# Altium PCB MachSacXa.PcbDoc
Units mil, origin at the board's own origin, x right, y up, seen from the top; angles counter-clockwise.
Board outline 8510 x 2835 mil, 2 copper layers (Top Layer, Bottom Layer); 123 components, 50 nets, 379 pads, 95 vias.
Unrouted connection lines stored in the file: 3.
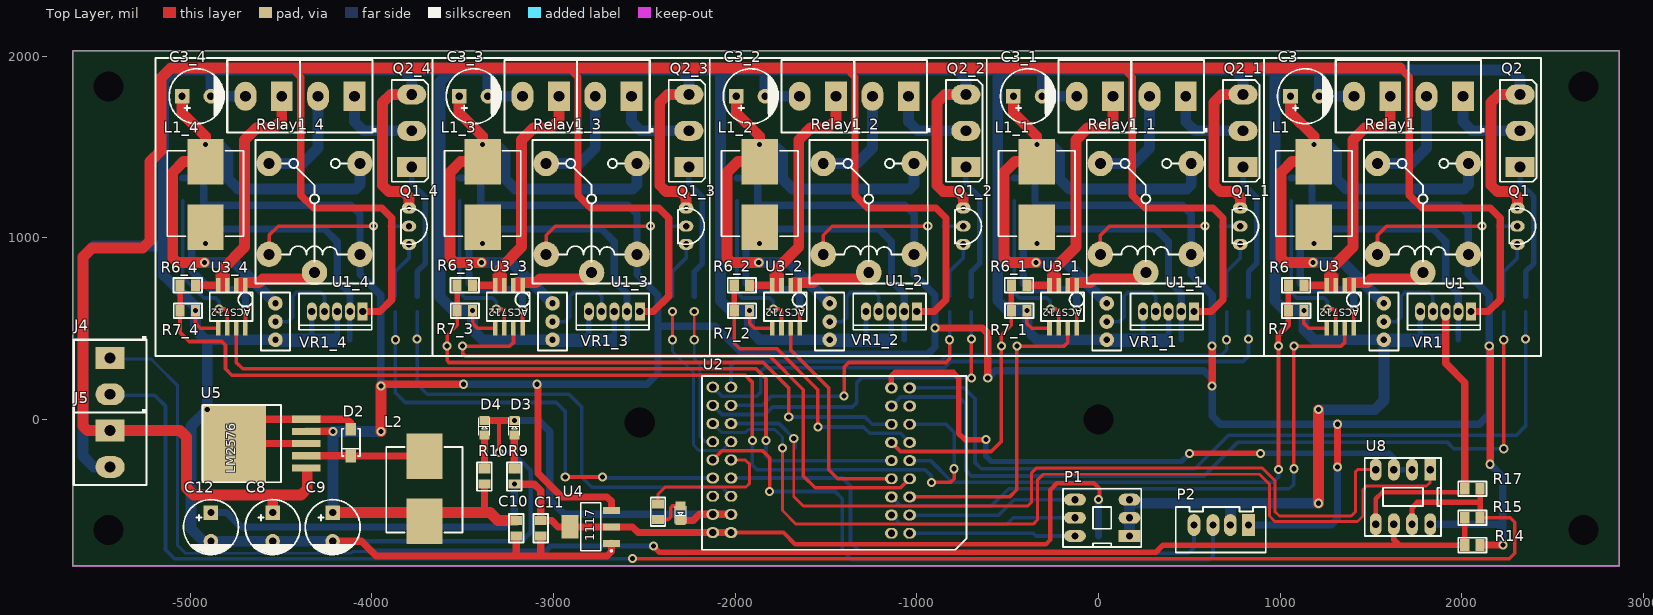
[diagram p0: Top Layer view]
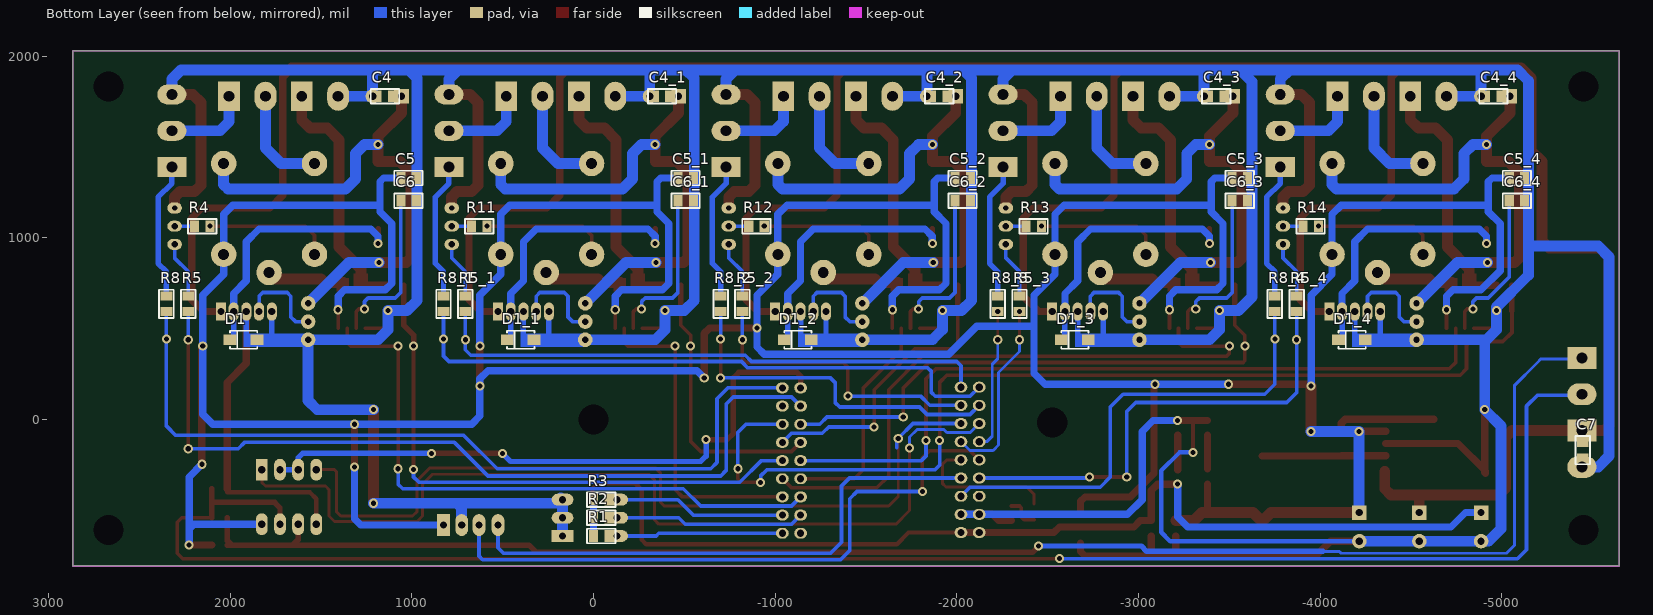
[diagram p1: Bottom Layer view, seen from below]
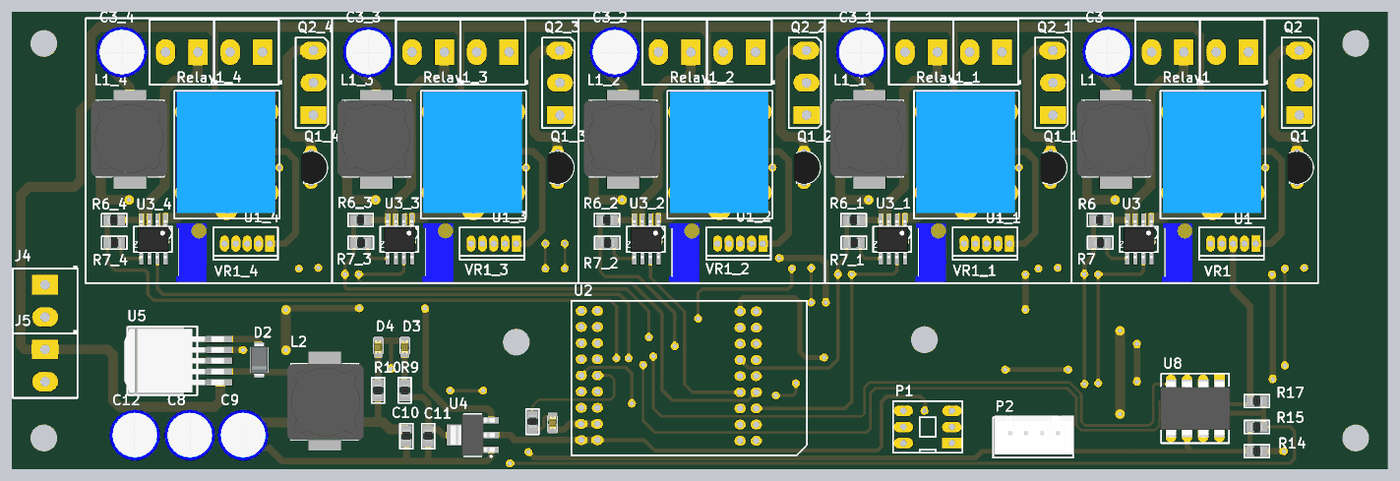
[diagram p2: 3D render of the assembled board from above, using the file's embedded part models]
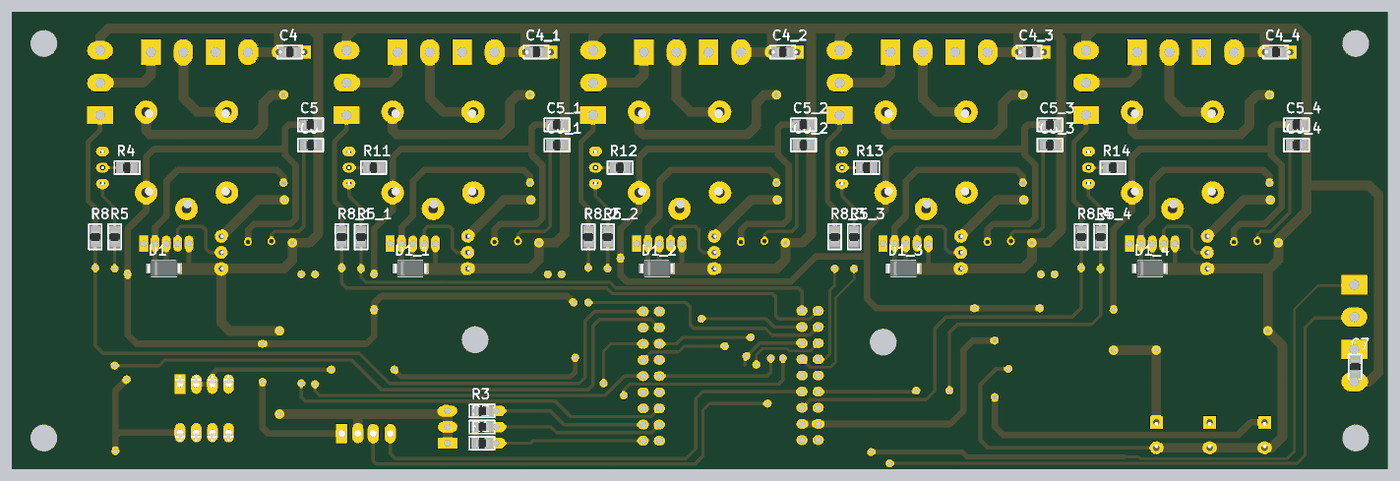
[diagram p3: 3D render of the assembled board from below, using the file's embedded part models]

## Layer stack, top to bottom
Top Layer: signal copper 1.4
Dielectric: dielectric 12.6, FR-4, Dk 4.8
Bottom Layer: signal copper 1.4

## Board outline
-5645,2030 2865,2030 2865,-805 -5645,-805

## Design rules (kind name [scope] priority, off if disabled: settings)
Clearance [All] p1: gap=10
PolygonConnect [All] p1: connectstyle=Relief reliefconductorwidth=10 reliefentries=4 polygonreliefangle="90 Angle" airgapwidth=10
RoutingVias [All] p1: holewidth=28 width=50 viastyle="Through Hole" minholewidth=28 minwidth=50 maxholewidth=28 maxwidth=50
SilkscreenOverComponentPads [All] p1: minsilkscreentomaskgap=10
SolderMaskExpansion [All] p1: expansion=4
Width [All] p1: maxlimit=120 minlimit=14 preferedwidth=20
27 further rules are at their usual default settings.

## Classes and differential pairs
component class MachSacXa: C3 C4 C5 C6 C7 C8 C9 C10 C11 C12 D1 D2 D3 D4 J4 J5 L1 L2 P1 P2 Q1 Q2 R1 R2 R3 R4 R5 R6 R7 R8 R9 R10 Relay1 U1 U2 U3 U4 U5 VR1 ""

## Components (designator, comment, footprint, x,y, rotation, side; value= is the part's Value field where it differs from the comment)
C3 "" C_D300 1135,1780 r0 top
C3_1 "" C_D300 -390,1780 r0 top (schematic designator C3)
C3_2 "" C_D300 -1915,1780 r0 top (schematic designator C3)
C3_3 "" C_D300 -3440,1780 r0 top (schematic designator C3)
C3_4 "" C_D300 -4965,1780 r0 top (schematic designator C3)
C4 "104" R/C_0805 1105,1780 r0 bottom
C4_1 "104" R/C_0805 -420,1780 r0 bottom (schematic designator C4)
C4_2 "104" R/C_0805 -1945,1780 r0 bottom (schematic designator C4)
C4_3 "104" R/C_0805 -3470,1780 r0 bottom (schematic designator C4)
C4_4 "104" R/C_0805 -4995,1780 r0 bottom (schematic designator C4)
C5 "104" R/C_0805 1060,1330 r180 bottom
C5_1 "104" R/C_0805 -465,1330 r180 bottom (schematic designator C5)
C5_2 "104" R/C_0805 -1990,1330 r180 bottom (schematic designator C5)
C5_3 "104" R/C_0805 -3515,1330 r180 bottom (schematic designator C5)
C5_4 "104" R/C_0805 -5040,1330 r180 bottom (schematic designator C5)
C6 "104" R/C_0805 1060,1205 r180 bottom
C6_1 "104" R/C_0805 -465,1205 r180 bottom (schematic designator C6)
C6_2 "104" R/C_0805 -1990,1205 r180 bottom (schematic designator C6)
C6_3 "104" R/C_0805 -3515,1205 r180 bottom (schematic designator C6)
C6_4 "104" R/C_0805 -5040,1205 r180 bottom (schematic designator C6)
C7 "104" R/C_0805 -5445,-125 r270 bottom
C8 "" C_D300 -4545,-590 r270 top
C9 "" C_D300 -4215,-590 r270 top
C10 "104" R/C_0805 -3205,-555 r270 top
C11 "104" R/C_0805 -3070,-555 r270 top
C12 "" C_D300 -4885,-590 r270 top
D1 "Diode 1N5822" Diode_1A 1970,440 r180 bottom
D1_1 "Diode 1N5822" Diode_1A 445,440 r180 bottom (schematic designator D1)
D1_2 "Diode 1N5822" Diode_1A -1080,440 r180 bottom (schematic designator D1)
D1_3 "Diode 1N5822" Diode_1A -2605,440 r180 bottom (schematic designator D1)
D1_4 "Diode 1N5822" Diode_1A -4130,440 r180 bottom (schematic designator D1)
D2 "Diode 1N5822" Diode_1A -4115,-170 r90 top
D3 "LED" "LED_SMD (0805)" -3215,-85 r90 top
D4 "LED" "LED_SMD (0805)" -3380,-85 r90 top
J1 "VCC" HEADER1_2(400) 1605,1780 r180 top
J1 "VCC" HEADER1_2(400) 80,1780 r180 top
J1 "VCC" HEADER1_2(400) -1445,1780 r180 top
J1 "VCC" HEADER1_2(400) -2970,1780 r180 top
J1 "VCC" HEADER1_2(400) -4495,1780 r180 top
J2 "VCC" HEADER1_2(400) 2005,1780 r180 top
J2 "VCC" HEADER1_2(400) 480,1780 r180 top
J2 "VCC" HEADER1_2(400) -1045,1780 r180 top
J2 "VCC" HEADER1_2(400) -2570,1780 r180 top
J2 "VCC" HEADER1_2(400) -4095,1780 r180 top
J4 "VCC" HEADER1_2(400) -5440,340 r270 top
J5 "VCC" HEADER1_2(400) -5440,-60 r270 top
L1 "Inductor" Cuon_cam(100mH) 1185,1060 r90 top
L1_1 "Inductor" Cuon_cam(100mH) -340,1060 r90 top (schematic designator L1)
L1_2 "Inductor" Cuon_cam(100mH) -1865,1060 r90 top (schematic designator L1)
L1_3 "Inductor" Cuon_cam(100mH) -3390,1060 r90 top (schematic designator L1)
L1_4 "Inductor" Cuon_cam(100mH) -4915,1060 r90 top (schematic designator L1)
L2 "Inductor" Cuon_cam(100mH) -3710,-200 r270 top
LedFlick "LED" "LED_SMD (0805)" -2300,-475 r270 top
P1 "Header 3X2" DIP6_300 170,-640 r180 top
P2 "Header 4" CON-Trang1_4 825,-580 r180 top
Q1 "TR_NPN_ECB" C1815/C945 2305,1165 r270 top
Q1_1 "TR_NPN_ECB" C1815/C945 780,1165 r270 top (schematic designator Q1)
Q1_2 "TR_NPN_ECB" C1815/C945 -745,1165 r270 top (schematic designator Q1)
Q1_3 "TR_NPN_ECB" C1815/C945 -2270,1165 r270 top (schematic designator Q1)
Q1_4 "TR_NPN_ECB" C1815/C945 -3795,1165 r270 top (schematic designator Q1)
Q2 "TR_NPN_D718" D718 2320,1390 r90 top
Q2_1 "TR_NPN_D718" D718 795,1390 r90 top (schematic designator Q2)
Q2_2 "TR_NPN_D718" D718 -730,1390 r90 top (schematic designator Q2)
Q2_3 "TR_NPN_D718" D718 -2255,1390 r90 top (schematic designator Q2)
Q2_4 "TR_NPN_D718" D718 -3780,1390 r90 top (schematic designator Q2)
R1 "" R/C_0805 -85,-640 r0 bottom
R2 "" R/C_0805 -85,-540 r0 bottom
R3 "" R/C_0805 -85,-440 r0 bottom
R4 "" R/C_0805 2195,1065 r180 bottom
R5 "" R/C_0805 2230,595 r90 bottom
R5_1 "" R/C_0805 705,595 r90 bottom (schematic designator R5)
R5_2 "" R/C_0805 -820,595 r90 bottom (schematic designator R5)
R5_3 "" R/C_0805 -2345,595 r90 bottom (schematic designator R5)
R5_4 "" R/C_0805 -3870,595 r90 bottom (schematic designator R5)
R6 "" R/C_0805 1045,740 r0 top
R6_1 "" R/C_0805 -480,740 r0 top (schematic designator R6)
R6_2 "" R/C_0805 -2005,740 r0 top (schematic designator R6)
R6_3 "" R/C_0805 -3530,740 r0 top (schematic designator R6)
R6_4 "" R/C_0805 -5055,740 r0 top (schematic designator R6)
R7 "" R/C_0805 1130,600 r180 top
R7_1 "" R/C_0805 -395,600 r180 top (schematic designator R7)
R7_2 "" R/C_0805 -1920,600 r180 top (schematic designator R7)
R7_3 "" R/C_0805 -3445,600 r180 top (schematic designator R7)
R7_4 "" R/C_0805 -4970,600 r180 top (schematic designator R7)
R8 "" R/C_0805 2350,595 r90 bottom
R8_1 "" R/C_0805 825,595 r90 bottom (schematic designator R8)
R8_2 "" R/C_0805 -700,595 r90 bottom (schematic designator R8)
R8_3 "" R/C_0805 -2225,595 r90 bottom (schematic designator R8)
R8_4 "" R/C_0805 -3750,595 r90 bottom (schematic designator R8)
R9 "" R/C_0805 -3215,-355 r90 top
R10 "" R/C_0805 -3380,-355 r90 top
R11 "" R/C_0805 670,1065 r180 bottom (schematic designator R4)
R12 "" R/C_0805 -855,1065 r180 bottom (schematic designator R4)
R13 "" R/C_0805 -2380,1065 r180 bottom (schematic designator R4)
R14 "Res1" R/C_0805 2015,-690 r0 top (schematic designator R17)
R14 "" R/C_0805 -3905,1065 r180 bottom (schematic designator R4)
R15 "Res1" R/C_0805 2015,-540 r0 top
R17 "Res1" R/C_0805 2015,-380 r0 top
R_LedFlick "" R/C_0805 -2425,-465 r270 top
Relay1 "Relay" RL5P_12V7A 1785,810 r180 top
Relay1_1 "Relay" RL5P_12V7A 260,810 r180 top (schematic designator Relay1)
Relay1_2 "Relay" RL5P_12V7A -1265,810 r180 top (schematic designator Relay1)
Relay1_3 "Relay" RL5P_12V7A -2790,810 r180 top (schematic designator Relay1)
Relay1_4 "Relay" RL5P_12V7A -4315,810 r180 top (schematic designator Relay1)
U1 "LM2576S-5" LM2576#1 2050,595 r180 top
U1_1 "LM2576S-5" LM2576#1 525,595 r180 top (schematic designator U1)
U1_2 "LM2576S-5" LM2576#1 -1000,595 r180 top (schematic designator U1)
U1_3 "LM2576S-5" LM2576#1 -2525,595 r180 top (schematic designator U1)
U1_4 "LM2576S-5" LM2576#1 -4050,595 r180 top (schematic designator U1)
U2 "STM32F103_C8T6_Adapter" Dip36(9x4) -1140,-625 r90 top
U3 "ACS712" DS1307 1405,700 r180 top
U3_1 "ACS712" DS1307 -120,700 r180 top (schematic designator U3)
U3_2 "ACS712" DS1307 -1645,700 r180 top (schematic designator U3)
U3_3 "ACS712" DS1307 -3170,700 r180 top (schematic designator U3)
U3_4 "ACS712" DS1307 -4695,700 r180 top (schematic designator U3)
U4 "AMS1117_3.3V" AMS1117_(SOT_223) -2795,-590 r180 top
U5 "LM2576S-5" LM2576#2 -4420,-265 r90 top
U8 "MAX485" DIP8_300 1825,-275 r270 top
VR1 "Bien tro" VR_3 1570,640 r270 top
VR1_1 "Bien tro" VR_3 45,640 r270 top (schematic designator VR1)
VR1_2 "Bien tro" VR_3 -1480,640 r270 top (schematic designator VR1)
VR1_3 "Bien tro" VR_3 -3005,640 r270 top (schematic designator VR1)
VR1_4 "Bien tro" VR_3 -4530,640 r270 top (schematic designator VR1)

## Footprints (in the part's own frame and the unit in brackets; to place one, negate y for a bottom-side part, rotate by r counter-clockwise, add the part's x,y. Pads: shape width x height; smd on the part's side, far side on the other; paste and mask are expansions set on the pad)
AMS1117_(SOT_223) [mm] "SOT223, 4-Leads, Body 6.5x3.5mm, Pitch 2.3mm, Lead Span 7mm, IPC Medium Density"
  rect 2.4x1 smd: 1(-2.9,2.3) 2(-2.9,0) 3(-2.9,-2.3)
  rect 2.4x3.3 smd: 2(2.9,0)
  silkscreen extent -3.03,-3.35 1.4,3.47, body extent -3.5,-3.25 3.5,3.25, height 1.65
C1815/C945 [mil]
  oval 60x80 hole 30: 1(0,0)
  oval 60x80 hole 35: 2(100,0) 3(200,0)
  silkscreen extent 0,-45 200,100, body extent -9,-61 209,100, height 285
C_D300 [mil] "D = 250mil"
  rect 80x80 hole 40: 1(-78.74,0)
  round 80 hole 40: 2(78.74,0)
  silkscreen extent -150,-151 155,151, body extent -158,-158 158,158, height 473
CON-Trang1_4 [mil]
  rect 70x120 hole 40: 1(0,0)
  oval 70x120 hole 40: 2(100,0) 3(195,0) 4(300,0)
  silkscreen extent -95,-100 400,150, body extent -98,-110 390,130, height 290
Cuon_cam(100mH) [mil]
  rect 250x200 smd: 1(0,0) 2(360,0)
  silkscreen extent -50,-210 420,210, body extent -51,-231 421,241, height 318
D718 [mil]
  rect 110x160 hole 60: 1(0,0)
  oval 110x160 hole 60: 2(200,0) 3(400,0)
  silkscreen extent -80,-91 480,110
Diode_1A [mil] "Capacitor SMD 120x60mil"
  rect 70x59.06 smd: 1(118.11,0) 2(-30,0)
  silkscreen extent -30,-50 120,50, body extent -57,-50 147,52, height 95
DIP6_300 [mil]
  rect 120x65 hole 40: 1(0,0)
  oval 120x65 hole 40: 2(0,-100) 3(0,-200) 4(300,-200) 5(300,-100) 6(300,0)
  silkscreen extent -65,-260 365,60
DIP8_300 [mil]
  rect 120x65 hole 40: 1(0,0)
  oval 120x65 hole 40: 2(0,-100) 3(0,-200) 4(0,-300) 5(300,-300) 6(300,-200) 7(300,-100) 8(300,0)
  silkscreen extent -65,-360 365,60, body extent -55,-366 355,67, height 145
Dip36(9x4) [mil]
  oval 60x70 hole 40: 1(0,0) 2(0,-100) 3(100,0) 4(100,-100) 5(200,0) 6(200,-100) 7(300,0) 8(300,-100) 9(400,0) 10(400,-100) 11(500,0) 12(500,-100) 13(600,0) 14(600,-100) 15(700,0) 16(700,-100) 17(800,0) 18(800,-100) 19(803.94,882.68) 20(803.94,982.68) 21(703.94,882.68) 22(703.94,982.68) 23(603.94,882.68) 24(603.94,982.68) 25(503.94,882.68) 26(503.94,982.68) 27(403.94,882.68) 28(403.94,982.68) 29(303.94,882.68) 30(303.94,982.68) 31(203.94,882.68) 32(203.94,982.68) 33(103.94,882.68) 34(103.94,982.68) 35(3.94,882.68) 36(3.94,982.68)
  silkscreen extent -91,-413 866,1043
DS1307 [mm]
  rect 0.635x2.032 smd: 1(0,-1)
  rect 0.635x2.03 smd: 2(1.27,-1)
  rect 0.635x2 smd: 3(2.54,-1) 4(3.81,-1) 5(3.81,5) 6(2.54,5) 7(1.27,5) 8(0,5)
  silkscreen extent -1,0 5,4, body extent -0.51,-1.02 4.39,4.98, height 1.75
HEADER1_2(400) [mil]
  rect 120x160 hole 60: 1(0,0)
  oval 120x160 hole 60: 2(200,0)
  silkscreen extent -120,-200 300,200
"LED_SMD (0805)" [mil]
  rect 50x55 smd: 1(0,0)
  rect 50x55.12 smd: 2(80,0)
  silkscreen extent 0,-30 95,30, body extent 0,-24 80,25, height 43
LM2576#1 [mil]
  rect 55x100 hole 40: 1(0,0)
  oval 55x100 hole 40: 2(70,0) 3(140,0) 4(210,0) 5(280,0)
  silkscreen extent -50,-100 350,100
LM2576#2 [mil]
  rect 39.37x157.48 smd: 1(0,-59.06) 2(66.93,-59.06) 3(133.86,-59.06) 4(200.79,-59.06) 5(267.72,-59.06)
  rect 433.07x354.33 smd: ""(133.86,338.58)
  silkscreen extent -79,79 346,512, body extent -62,-86 332,530, height 190
R/C_0805 [mil]
  rect 50x65 smd: 1(0,0) 2(85,0)
  silkscreen extent -36,-40 120,40, body extent 1,-24 79,25, height 22
RL5P_12V7A [mil] "Relay 5Pin 12V 7A"
  round 140 hole 60: 1(0,0) 2(250,-600) 3(-250,-600) 4(-250,-100) 5(250,-100)
  silkscreen extent -325,-730 325,60, body extent -300,-727 310,25, height 602
VR_3 [mil] "Bien tro dien dung"
  round 80 hole 35: 1(0,0) 2(100,0) 3(200,0)
  silkscreen extent -60,-80 260,80, body extent -81,-100 281,89, height 479

## Part data
C3 C3_1 C3_2 C3_3 C3_4 C8 C9 C12: library part Cap2, "Capacitor"
C4 C4_1 C4_2 C4_3 C4_4 C5 C5_1 C5_2 C5_3 C5_4 C6 C6_1 C6_2 C6_3 C6_4 C7 C10 C11: library part Cap, "Capacitor"
D1 D1_1 D1_2 D1_3 D1_4 D2: library part "Diode 1N4004", "1 Amp General Purpose Rectifier"
D3 D4 LedFlick: library part LED0, "Typical INFRARED GaAs LED"
J1 J1 J1 J1 J1 J2 J2 J2 J2 J2 J4 J5: library part "Header 2", "Header, 2-Pin"
P1: "Header, 3-Pin, Dual row"
P2: "Header, 4-Pin"
R1 R2 R3 R4 R5 R5_1 R5_2 R5_3 R5_4 R6 R6_1 R6_2 R6_3 R6_4 R7 R7_1 R7_2 R7_3 R7_4 R8 R8_1 R8_2 R8_3 R8_4 R9 R10 R11 R12 R13 R14 R_LedFlick: library part Res2, "Resistor"
R14 R15 R17: "Resistor"
Relay1 Relay1_1 Relay1_2 Relay1_3 Relay1_4: "SPDT Relay"
U1 U1_1 U1_2 U1_3 U1_4 U5: library part LM2576S-5.0, "Simple Switcher 3A Step Down Voltage Regulator"
U2: library part STM32_C8T6_Adapter
VR1 VR1_1 VR1_2 VR1_3 VR1_4: library part VR

## Free pads (board coordinates)
  round 60 hole 165.35: 0(-5448.15,1833.15) 1(2668.15,1833.15) 2(0,0) 2(2668.15,-608.15) 3(-5448.15,-608.15) 3(-2525,-15)

## Via types
v1: diameter 50, hole 28, Top Layer to Bottom Layer, 95 vias

## Nets (pads, with @x,y where several pads share a name; then routed paths per layer and width w, separated by ;. In a path a pad name is that pad's centre, name@x,y a point inside that pad or via, vN(x,y) a via of type N, cw(c..) or ccw(c..) an arc to the next point about the centre after c; other vN are vias at no path point)
FB_1: U1.4 VR1.2 | length 496.9
  Bottom Layer w20: VR1.2 1640,540 1665,565 1665,680 1685,700 1820,700 1840,680 U1.4
GND: C3.2 C4.2 C5.2 C6.2 C7.2 C8.2 C9.2 C10.2 C11.2 C12.2 D1.1 D2.1 D3.2 D4.2 J1.2@1405,1780 J5.2 LedFlick.2 P1.1 P1.2 P1.3 P2.2 Q1.1 Q2.3 R7.1 R17.1 U1.3 U1.5 U2.33 U2.34 U3.5 U4.1 U5. U5.3 U5.5 VR1.3 VR1_4.3 | length 27691.3
  Top Layer w20: v1(1130,600) 1130,530 1156.85,503.15 U3.5
  Top Layer w24: v1(-3300,-180) -3300,-10
  Top Layer w40: v1(-4905,55) -4905,-290 -4910,-295 -4910,-282.56 U5. U5.3 ; U5.@-4624.72,2.72 U5.5 -4137.72,2.72 -4115,-20 D2.1 ; C9.2 -4056.26,-668.74 -3975,-750 -2705,-750 -2680.83,-725.83 U4.1 ; D4.2 v1(-3215,-5) ; -3205,-740 C10.2 ; -3070,-735 C11.2 ; LedFlick.2 -2230,-555 -2196.06,-521.06 U2.34 U2.33 ; U1.3 1910,310 2015,205 R17.1
  Top Layer w60: v1(1210,-460) v1(1210,55) ; Q1.1 2305,1225 2275,1255 2195,1255 2160,1290 2160,1745 2205,1790 Q2.3
  Bottom Layer w24: C9.2 -3173.74,-668.74 -3125,-620 -3125,-280 -3225,-180 v1(-3300,-180)
  Bottom Layer w30: VR1.3@1570,450 1580,440 1770,440 ; U1.5 1770,440 ; U1.3 1910,465 1885,440 D1.1 1770,440
  Bottom Layer w40: v1(-3215,-5) -3080,-5 -3020,-65 -3020,-440 -2938.94,-521.06 U2.34 U2.33
  Bottom Layer w60: J5.2 -5530,-260 -5590,-200 -5590,895 -5530,955 -5145,955 ; -4905,430 v1(-4905,55) -4995,-35 -4995,-600 -4926.26,-668.74 C12.2 C8.2 C9.2 ; VR1_4.3 -4915,440 -4970,495 -4970,620 -5145,795 -5145,955 ; -3500,1925 -5085,1925 -5145,1865 -5145,955 ; -3360,1925 -1975,1925 ; -1835,1925 -450,1925 ; -310,1925 1215,1925 ; P1.1 P1.2 P1.3 P1.3@180,-430 ; P1.3@180,-460 750,-460 ; P2.2@725,-600 725,-485 750,-460 ; 1015,1925 970,1880 970,655 1025,600 v1(1130,600) 1130,495 1185,440 VR1.3 1570,105 1520,55 v1(1210,55) ; v1(1210,-460) 750,-460 ; J1.2@1405,1780 C3.2 1215,1781.26 1215,1925 ; Q2.3 2320,1875 2270,1925 1215,1925
IN1: P1.6 R1.1 U2.2 | length 916.2
  Bottom Layer w20: U2.2 -360,-625 -345,-640 P1.6
IN2: P1.5 R2.1 U2.3 | length 1045.2
  Bottom Layer w20: U2.3 -1090,-575 -505,-575 -470,-540 P1.5
IN3: P1.4 R3.1 U2.4 | length 945.2
  Bottom Layer w20: U2.4 -550,-525 -465,-440 P1.4
IOUT_1: U2.5 U3.7 | length 3411.9
  Top Layer w20: v1(1075,-270) v1(1075,405) 1335,405 1355,425 U3.7
  Bottom Layer w20: U2.5 -1090,-475 -590,-475 -495,-380 1050,-380 1075,-355 v1(1075,-270)
IOUT_2: U2.6 | length 1396.6
  Top Layer w20: U2.6 -490,-425 -450,-385 v1(-450,405)
IOUT_3: U2.7 U3_2.7 | length 1230.8
  Top Layer w20: U3_2.7 -1695,385 -1485,175 -1485,-275 -1435,-325 U2.7
IOUT_4: U2.8 | length 3105.5
  Top Layer w20: v1(-3500,405) -3500,365 -3485,350 -1810,350 -1625,165 -1625,-310 -1560,-375 -1090,-375 U2.8
IOUT_5: U2.9 U3_4.7 | length 4265.8
  Top Layer w20: U3_4.7 -4745,315 -4710,280 -1885,280 -1830,225 v1(-1830,-115)
  Bottom Layer w20: v1(-1830,-115) -1830,-200 -1805,-225 U2.9
IP+_1: Relay1.1 U3.1 U3.2 | length 432.8
  Top Layer w60: 1375,755 1480,755 1500,775 1750,775 Relay1.1
IP-_1: J1.1@1605,1780 R6.2 U3.3 U3.4 | length 1380.3
  Top Layer w40: R6.2 1280,740
  Top Layer w60: 1280,740 1280,830 1400,950 1400,1540 1465,1605 1560,1605 1605,1650 J1.1@1605,1780
NAP_1: R5.1 U2.15 | length 4630.8
  Top Layer w20: v1(2230,-160) v1(2230,440)
  Bottom Layer w20: U2.15 -1090,125 -770,125 -730,85 -730,-280 -700,-310 580,-310 765,-125 1920,-125 1955,-160 v1(2230,-160) ; v1(2230,440) R5.1
NAP_2: U2.19 | length 2937.4
  Bottom Layer w20: U2.19 -2022.68,297.32 -2000,320 -870,320 -835,355 675,355 705,385 v1(705,440)
NAP_3: U2.21 | length 1507.5
  Top Layer w20: v1(-1400,130) -1400,290 -1375,315 -840,315 -820,335 v1(-820,440)
  Bottom Layer w20: U2.21 -1851.06,78.94 -1800,130 v1(-1400,130)
NAP_4: R5_3.1 U2.25 | length 1022.7
  Top Layer w16: v1(-2345,440) v1(-2345,595)
  Bottom Layer w16: v1(-2345,440) -2345,375 -2230,260 -2230,-140 -2200,-170 -2071.61,-170 U2.25
NAP_5: U2.30 | length 2443.3
  Top Layer w20: v1(-2935,-315) v1(-2730,-315)
  Bottom Layer w20: v1(-3870,440) -3870,150 -3815,95 -2985,95 -2935,45 v1(-2935,-315) ; v1(-2730,-315) -2723.94,-321.06 U2.30
NetC6_1: C6.1 U3.6 | length 908.8
  Top Layer w20: v1(1260,610) 1290,610 1305,595 U3.6
  Bottom Layer w20: C6.1 1060,700 1090,670 1240,670 1260,650 v1(1260,610)
NetD1_2: D1.2 L1.1 U1.2 | length 1459.6
  Top Layer w30: v1(1185,970) L1.1@1185,1050
  Bottom Layer w30: D1.2@1980,440 U1.2
  Bottom Layer w40: v1(1185,970) 1185,1010 1225,1050 1840,1050 1910,980 1910,765 1980,695 U1.2
NetD2_2: D2.2 L2.1 U5.2 | length 681.7
  Top Layer w40: U5.2 -4116.93,-198.07 D2.2 L2.1@-3680,-200
NetD3_1: D3.1 R9.2 | length 190
  Top Layer w40: R9.2@-3215,-275 D3.1
NetD4_1: D4.1 R10.2 | length 185
  Top Layer w40: R10.2 D4.1
NetJ2_1: J2.1@2005,1780 Q2.2 | length 475.7
  Bottom Layer w60: J2.1@2005,1780 2005,1640 2055,1590 Q2.2
NetLedFlick_1: LedFlick.1 R_LedFlick.2 | length 185.4
  Top Layer w20: R_LedFlick.2 -2370,-550 -2355,-535 -2355,-485 -2345,-475 LedFlick.1
NetQ1_2: Q1.2 R4.1 | length 110
  Bottom Layer w20: R4.1 Q1.2
NetQ1_3: Q1.3 R5.2 | length 316.1
  Bottom Layer w20: R5.2 2230,815 2305,890 Q1.3
NetQ2_1: Q2.1 R8.2 | length 759.7
  Bottom Layer w30: Q2.1 2320,1300 2395,1225 2395,860 2350,815 R8.2
NetR4_2: R4.2 Relay1.5 | length 700.7
  Top Layer w20: Relay1.5 1535,1015 1585,1065 v1(2110,1065)
NetR_LedFlick_1: R_LedFlick.1 U2.27 | length 802.4
  Top Layer w16: R_LedFlick.1 -2425,-410 -2385,-370 -1940,-370 -1920,-350 -1920,-245 -1943.94,-221.06 U2.27
RIS_1: J2.2@1805,1780 Relay1.2 | length 590.2
  Bottom Layer w60: Relay1.2 1720,1410 1805,1495 J2.2@1805,1780
RX1: U2.24 U8.1 | length 5123.8
  Top Layer w16: v1(-1740,-155) -1740,-500 -1665,-575 -360,-575 -335,-550 -335,-330 -305,-300 885,-300 940,-355 940,-530 970,-560 1425,-560 1455,-530 1455,-385 1475,-365 1805,-365 1825,-345 U8.1
  Bottom Layer w16: U2.24 -2073.74,-70 -1945,-70 -1930,-55 -1780,-55 -1740,-95 v1(-1740,-155)
RX3: U2.17 U8.2 U8.3 | length 3466.6
  Top Layer w30: U2.17 -1140,240 -1120,260 -800,260 -770,230 -770,-75 -735,-110 v1(-620,-110) ; v1(500,-185) v1(890,-185)
  Bottom Layer w30: v1(-620,-110) -620,-200 -590,-230 455,-230 v1(500,-185) ; v1(890,-185) 1600,-185 1625,-210 U8.3 U8.2
SCL: P2.3 U2.28 | length 3475.1
  Top Layer w20: U2.28 -2072.68,-171.06 -1848.94,-171.06 -1810,-210 v1(-1810,-395)
  Bottom Layer w20: v1(-1810,-395) -1450,-395 -1410,-435 -1410,-720 -1360,-770 610,-770 630,-750 P2.3
SDA: P2.4 U2.29 | length 3038.2
  Bottom Layer w20: U2.29 -1408.94,-321.06 -1365,-365 -1365,-675 -1305,-735 495,-735 525,-705 P2.4
TX1: U2.23 U8.4 | length 4603.3
  Top Layer w16: v1(-1677.5,-102.5) -1677.5,-422.5 -1625,-475 -390,-475 -370,-455 -370,-295 -340,-265 900,-265 970,-335 970,-505 995,-530 1390,-530 1415,-505 1415,-285 1425,-275 U8.4
  Bottom Layer w20: U2.23 -1758.94,-21.06 v1(-1677.5,-102.5) -1670,-110 -1670,-155
TX3: J4.2
VCC-3V3: C11.1 C12.1 R1.2 R2.2 R3.2 R9.1 U2.35 U2.36 U4.2 | length 5926
  Top Layer w24: U2.35 -1733.94,-621.06 -1670,-685 -290,-685 -265,-660 -265,-385 -230,-350 -25,-350 5,-380 v1@5,-435
  Top Layer w40: v1(-3215,-355) -3105,-355 -3070,-390 C11.1 -3010,-555 -2975,-590 -2909.17,-590 -2680.83,-590 -2565,-590 -2533.94,-621.06 U2.36 U2.35
  Bottom Layer w40: C12.1 -4798.74,-511.26 -4720,-590 -3270,-590 -3215,-535 v1(-3215,-355) ; R1.2 R2.2 v1(0,-440)
VCC-5V: C5.1 C9.1 C10.1 L2.2 P2.1 R10.1 Relay1.4 U3.8 U4.3 U5.4 U8.8 | length 16400.6
  Top Layer w20: U3.8 v1(1405,605)
  Top Layer w40: U5.4 v1(-4214.21,-64.21) ; v1(-3950,185) -3940,195 v1(-3495,195) ; -3380,-505 R10.1 ; v1(-3090,195) -3085,190 -3085,-295 -2955,-425 -2705,-425 -2680.83,-449.17 U4.3 ; v1(-900,505) -640,505 -610,475 v1(-610,230) ; v1(1315,-260) v1(1315,-25) ; v1(2155,-245) v1@2155,395
  Top Layer w60: C9.1 -3728.74,-511.26 -3680,-560 -3630,-510 -3350,-510 -3305,-555 C10.1 ; v1(-3950,-65) v1(-3950,185)
  Bottom Layer w40: v1(-3495,195) v1(-3090,195) -2485,195 -2425,255 -2425,685 ; -2415,515 -2110,515 -1955,360 -940,360 -900,400 v1(-900,505) ; v1(-610,230) -570,270 580,270 625,225 625,20 670,-25 v1(1315,-25) 2095,-25 2150,30 v1(2150,405) 2150,685 2035,800 Relay1.4 2035,1130 1985,1180 1175,1180 ; P2.1 1280,-580 1315,-545 v1(1315,-260) ; C5.1 1155,1330 1175,1310 1175,1145 1110,1080 1110,750 1145,715 1370,715 1405,680 v1(1405,605) ; U8.8 2200,-575 2225,-600 ; v1(2155,-245) 2225,-315 2225,-600 ; 2225,-690 2225,-600
  Bottom Layer w60: C9.1 -4214.21,-510.47 v1(-4214.21,-64.21) -3950.79,-64.21 v1(-3950,-65)
  other v1: 625,185
VCC-5V_1: C3.1 C4.1 L1.2 Relay1.3 VR1.1 | length 2915.6
  Top Layer w60: C3.1 1056.26,1688.74 1185,1560 v1(1185,1515) L1.2 1065,1420 1005,1360 1005,890 1030,865 v1(1180,865)
  Bottom Layer w60: v1(1180,865) 1345,865 VR1.1 ; v1(1185,1515) 1260,1515 1310,1465 1310,1325 1365,1270 2010,1270 2035,1295 Relay1.3
VCC-12V: C7.1 C8.1 J5.1 U1.1 U1_1.1 U1_2.1 U1_3.1 U1_4.1 U5.1 | length 20397.4
  Top Layer w40: -4440,1935 -4390,1885 -4390,1235 -4320,1165 -3945,1165 -3890,1110 -3890,660 -3955,595 U1_4.1 ; -2915,1935 -2865,1885 -2865,1235 -2795,1165 -2420,1165 -2365,1110 -2365,680 -2450,595 U1_3.1 ; -1390,1935 -1340,1885 -1340,1235 -1270,1165 -895,1165 -840,1110 -840,660 -905,595 U1_2.1 ; 135,1935 185,1885 185,1235 255,1165 630,1165 685,1110 685,660 620,595 U1_1.1 ; 1660,1935 1710,1885 1710,1235 1780,1165 2155,1165 2210,1110 2210,660 2145,595 U1.1
  Top Layer w60: C8.1 -4545,-415 ; -4355,-285 -4355,-380 -4390,-415 -4545,-415 ; 1660,1935 -5105,1935 -5160,1880 -5160,1480 -5220,1420 -5220,985 -5260,945 -5540,945 -5590,895 -5590,-35 -5565,-60 J5.1 -5055,-60 -5020,-95 -5020,-375 -4980,-415 -4545,-415
VOUT_1: R6.1 R7.2 U2.10 | length 3169.9
  Top Layer w20: v1(990,-275) v1(990,405)
  Top Layer w30: v1(990,405) 990,465 1045,520 R7.2 R6.1
  Bottom Layer w20: U2.10 -925,-225 -805,-345 960,-345 990,-315 v1(990,-275)
VOUT_2: U2.11 | length 1173.5
  Top Layer w20: U2.11 -1090,-175 -590,-175 -535,-120 v1(-535,405)
VOUT_3: R7_2.2 U2.12 | length 1630.8
  Top Layer w20: R7_2.2 -2005,420 -1975,390 -1770,390 -1545,165 v1(-1545,-40)
  Top Layer w30: R7_2.2 -2005,740
  Bottom Layer w20: v1(-1545,-40) -1295,-40 -1260,-75 -1090,-75 U2.12
VOUT_4: U2.13 | length 2763.7
  Top Layer w20: v1(-3585,405) -3585,325 -3575,315 -1845,315 -1705,175 v1(-1705,15)
  Bottom Layer w20: v1(-1705,15) -1285,15 -1245,-25 U2.13
VOUT_5: R7_4.2 U2.14 | length 5611.8
  Top Layer w20: R7_4.2 -5055,480 -5005,430 -4825,430 -4805,410 -4805,280 -4770,245 -1945,245 -1905,205 v1(-1905,-115) ; v1(-920,-345) -815,-345 -795,-325 v1(-795,-270)
  Bottom Layer w20: v1(-1905,-115) -1905,-250 -1880,-275 -955,-275 -920,-310 v1(-920,-345) ; U2.14 -840,-25 -795,-70 v1(-795,-270)
XA_1: R8.1 U2.18 | length 4506.7
  Bottom Layer w20: U2.18 -740,175 -680,115 -680,-235 -645,-270 530,-270 715,-85 2300,-85 2350,-35 v1(2350,445) R8.1
XA_2: U2.20 | length 3222.3
  Bottom Layer w20: U2.20 -2072.68,128.94 -1881.06,128.94 -1860,150 -1860,265 -1840,285 -850,285 -815,320 795,320 825,350 v1(825,445)
XA_3: U2.22 | length 1806.1
  Top Layer w20: v1(-700,230) v1(-700,445)
  Bottom Layer w20: U2.22 -2072.68,28.94 -1836.06,28.94 -1795,70 -1355,70 -1330,95 -1330,205 -1305,230 v1(-700,230)
XA_4: R8_3.1 U2.26 | length 788.2
  Top Layer w16: v1(-2225,440) v1(-2225,595)
  Bottom Layer w16: v1@-2225,445 v1(-2225,440) -2225,335 -2195,305 -2195,-91.06 -2165,-121.06 U2.26
XA_5: U2.31 | length 2458
  Bottom Layer w20: v1(-3750,445) -3750,195 -3695,140 -2915,140 -2845,70 -2845,-315 -2788.94,-371.06 -2072.68,-371.06 U2.31
pads on no net: C3_1.1 C3_1.2 C3_2.1 C3_2.2 C3_3.1 C3_3.2 C3_4.1 C3_4.2 C4_1.1 C4_1.2 C4_2.1 C4_2.2 C4_3.1 C4_3.2 C4_4.1 C4_4.2 C5_1.1 C5_1.2 C5_2.1 C5_2.2 C5_3.1 C5_3.2 C5_4.1 C5_4.2 C6_1.1 C6_1.2 C6_2.1 C6_2.2 C6_3.1 C6_3.2 C6_4.1 C6_4.2 D1_1.1 D1_1.2 D1_2.1 D1_2.2 D1_3.1 D1_3.2 D1_4.1 D1_4.2 J1.1@80,1780 J1.1@-1445,1780 J1.1@-2970,1780 J1.1@-4495,1780 J1.2@-120,1780 J1.2@-1645,1780 J1.2@-3170,1780 J1.2@-4695,1780 J2.1@480,1780 J2.1@-1045,1780 J2.1@-2570,1780 J2.1@-4095,1780 J2.2@280,1780 J2.2@-1245,1780 J2.2@-2770,1780 J2.2@-4295,1780 J4.1 L1_1.1 L1_1.2 L1_2.1 L1_2.2 L1_3.1 L1_3.2 L1_4.1 L1_4.2 Q1_1.1 Q1_1.2 Q1_1.3 Q1_2.1 Q1_2.2 Q1_2.3 Q1_3.1 Q1_3.2 Q1_3.3 Q1_4.1 Q1_4.2 Q1_4.3 Q2_1.1 Q2_1.2 Q2_1.3 Q2_2.1 Q2_2.2 Q2_2.3 Q2_3.1 Q2_3.2 Q2_3.3 Q2_4.1 Q2_4.2 Q2_4.3 R5_1.1 R5_1.2 R5_2.1 R5_2.2 R5_3.2 R5_4.1 R5_4.2 R6_1.1 R6_1.2 R6_2.1 R6_2.2 R6_3.1 R6_3.2 R6_4.1 R6_4.2 R7_1.1 R7_1.2 R7_2.1 R7_3.1 R7_3.2 R7_4.1 R8_1.1 R8_1.2 R8_2.1 R8_2.2 R8_3.2 R8_4.1 R8_4.2 R11.1 R11.2 R12.1 R12.2 R13.1 R13.2 R14.1 R14.2 R15.1 R15.2 R17.2 Relay1_1.1 Relay1_1.2 Relay1_1.3 Relay1_1.4 Relay1_1.5 Relay1_2.1 Relay1_2.2 Relay1_2.3 Relay1_2.4 Relay1_2.5 Relay1_3.1 Relay1_3.2 Relay1_3.3 Relay1_3.4 Relay1_3.5 Relay1_4.1 Relay1_4.2 Relay1_4.3 Relay1_4.4 Relay1_4.5 U1_1.2 U1_1.3 U1_1.4 U1_1.5 U1_2.2 U1_2.3 U1_2.4 U1_2.5 U1_3.2 U1_3.3 U1_3.4 U1_3.5 U1_4.2 U1_4.3 U1_4.4 U1_4.5 U2.1 U2.16 U2.32 U3_1.1 U3_1.2 U3_1.3 U3_1.4 U3_1.5 U3_1.6 U3_1.7 U3_1.8 U3_2.1 U3_2.2 U3_2.3 U3_2.4 U3_2.5 U3_2.6 U3_2.8 U3_3.1 U3_3.2 U3_3.3 U3_3.4 U3_3.5 U3_3.6 U3_3.7 U3_3.8 U3_4.1 U3_4.2 U3_4.3 U3_4.4 U3_4.5 U3_4.6 U3_4.8 U8.5 U8.6 U8.7 VR1_1.1 VR1_1.2 VR1_1.3 VR1_2.1 VR1_2.2 VR1_2.3 VR1_3.1 VR1_3.2 VR1_3.3 VR1_4.1 VR1_4.2
copper on no net: | length 93306.8
  Top Layer w20: -5055,600 -5055,740 ; v1(-4970,600) -4970,530 -4943.15,503.15 -4845,503.15 ; v1(-4840,610) -4810,610 -4795,595 -4795,503.15 ; -4695,503.15 v1(-4695,605) ; -4565,910 -4565,1015 -4515,1065 v1(-3990,1065) ; -3585,405 -3585,465 -3530,520 -3530,600 -3530,740 ; -3500,405 -3240,405 -3220,425 -3220,503.15 ; v1(-3445,600) -3445,530 -3418.15,503.15 -3320,503.15 ; v1(-3315,610) -3285,610 -3270,595 -3270,503.15 ; -3170,503.15 v1(-3170,605) ; -3040,910 -3040,1015 -2990,1065 v1(-2465,1065) ; v1(-2565,-765) 2260,-765 2290,-735 2290,-565 2265,-540 2100,-540 ; -2005,600 -2005,740 ; v1(-1920,600) -1920,530 -1893.15,503.15 -1795,503.15 ; v1(-1790,610) -1760,610 -1745,595 -1745,503.15 ; -1645,503.15 v1(-1645,605) ; -1515,910 -1515,1015 -1465,1065 v1(-940,1065) ; -535,405 -535,465 -480,520 -480,600 -480,740 ; -450,405 -190,405 -170,425 -170,503.15 ; v1(-395,600) -395,530 -368.15,503.15 -270,503.15 ; v1(-265,610) -235,610 -220,595 -220,503.15 ; -120,503.15 v1(-120,605) ; 10,910 10,1015 60,1065 v1(585,1065)
  Top Layer w24: 1525,-575 1525,-435 1560,-400 2015,-400
  Top Layer w30: -5055,600 -5055,740 ; v1(-4915,970) -4915,1050 ; -3530,600 -3530,740 ; v1(-3390,970) -3390,1050 ; v1(-2450,-695) -2415,-730 315,-730 325,-720 355,-690 1150,-690 ; v1(-1865,970) -1865,1050 ; -480,600 -480,740 ; v1(-340,970) -340,1050 ; 1125,-690 1680,-690 ; 1625,-575 1625,-660 1655,-690 1990,-690 ; 1725,-575 1725,-485 1755,-455 2100,-455 ; 2015,-690 1990,-690 ; 2015,-540 2015,-665 1990,-690 ; 2100,-540 2100,-455 ; 2100,-380 2100,-455
  Top Layer w40: -4970,740 -4820,740 ; -3445,740 -3295,740 ; -1920,740 -1770,740 ; -395,740 -245,740 ; 625,185 v1(625,405) ; 2100,-690 v1(2225,-690)
  Top Layer w60: -5043.74,1780 -5043.74,1688.74 -4915,1560 v1(-4915,1515) -4915,1420 -5035,1420 -5095,1360 -5095,890 -5070,865 v1(-4920,865) ; -4820,740 -4820,830 -4700,950 -4700,1540 -4635,1605 -4540,1605 -4495,1650 -4495,1780 ; -4725,755 -4620,755 -4600,775 -4350,775 -4315,810 ; -3795,1165 -3795,1225 -3825,1255 -3905,1255 -3940,1290 -3940,1745 -3895,1790 -3780,1790 ; -3518.74,1780 -3518.74,1688.74 -3390,1560 v1(-3390,1515) -3390,1420 -3510,1420 -3570,1360 -3570,890 -3545,865 v1(-3395,865) ; -3295,740 -3295,830 -3175,950 -3175,1540 -3110,1605 -3015,1605 -2970,1650 -2970,1780 ; -3200,755 -3095,755 -3075,775 -2825,775 -2790,810 ; -2270,1165 -2270,1225 -2300,1255 -2380,1255 -2415,1290 -2415,1745 -2370,1790 -2255,1790 ; -1993.74,1780 -1993.74,1688.74 -1865,1560 v1(-1865,1515) -1865,1420 -1985,1420 -2045,1360 -2045,890 -2020,865 v1(-1870,865) ; -1770,740 -1770,830 -1650,950 -1650,1540 -1585,1605 -1490,1605 -1445,1650 -1445,1780 ; -1675,755 -1570,755 -1550,775 -1300,775 -1265,810 ; -745,1165 -745,1225 -775,1255 -855,1255 -890,1290 -890,1745 -845,1790 -730,1790 ; -468.74,1780 -468.74,1688.74 -340,1560 v1(-340,1515) -340,1420 -460,1420 -520,1360 -520,890 -495,865 v1(-345,865) ; -245,740 -245,830 -125,950 -125,1540 -60,1605 35,1605 80,1650 80,1780 ; -150,755 -45,755 -25,775 225,775 260,810 ; 780,1165 780,1225 750,1255 670,1255 635,1290 635,1745 680,1790 795,1790
  Bottom Layer w16: -5435,335 -5215,335 -5190,310 -5070,190 -5070,-690 -5025,-735 -4115,-735 -4105,-725 -4015,-725
  Bottom Layer w20: -5440,135 -5195,135 -5135,75 -5135,-715 -5085,-765 v1(-2565,-765) ; -5040,830 -5040,1205 -5040,785 -4925,670 -4860,670 -4840,650 v1(-4840,610) ; -4530,540 -4460,540 -4435,565 -4435,680 -4415,700 -4280,700 -4260,680 -4260,595 ; -3905,1065 -3795,1065 ; -3870,440 -3870,595 ; -3870,680 -3870,815 -3795,890 -3795,965 ; -3750,445 -3750,595 ; -3515,830 -3515,1205 -3515,700 -3485,670 -3335,670 -3315,650 v1(-3315,610) ; -3005,540 -2935,540 -2910,565 -2910,680 -2890,700 -2755,700 -2735,680 -2735,595 ; -2380,1065 -2270,1065 ; -2345,680 -2345,815 -2270,890 -2270,965 ; -1990,830 -1990,1205 -1990,700 -1960,670 -1810,670 -1790,650 v1(-1790,610) ; -1480,540 -1410,540 -1385,565 -1385,680 -1365,700 -1230,700 -1210,680 -1210,595 ; -855,1065 -745,1065 ; -820,440 -820,595 ; -820,680 -820,815 -745,890 -745,965 ; -700,445 -700,595 ; -465,1205 -465,700 -435,670 -285,670 -265,650 v1(-265,610) ; 45,540 115,540 140,565 140,680 160,700 295,700 315,680 315,595 ; 670,1065 780,1065 ; 705,440 705,595 ; 705,680 705,815 780,890 780,965 ; 825,445 825,595
  Bottom Layer w30: -4530,450 -4520,440 -4330,440 ; -4330,595 -4330,440 ; -4190,595 -4190,465 -4215,440 -4330,440 ; -4120,440 -4120,595 ; -4015,-725 -3045,-725 -3015,-695 v1(-2450,-695) ; -3780,1390 -3780,1300 -3705,1225 -3705,860 -3750,815 -3750,680 ; -3005,450 -2995,440 -2805,440 ; -2805,595 -2805,440 ; -2665,595 -2665,465 -2690,440 -2805,440 ; -2595,440 -2595,595 ; -2255,1390 -2255,1300 -2180,1225 -2180,860 -2225,815 -2225,680 ; -1480,450 -1470,440 -1280,440 ; -1280,595 -1280,440 ; -1140,595 -1140,465 -1165,440 -1280,440 ; -1070,440 -1070,595 ; -730,1390 -730,1300 -655,1225 -655,860 -700,815 -700,680 ; 45,450 55,440 245,440 ; 245,595 245,440 ; 385,595 385,465 360,440 245,440 ; 455,440 455,595 ; 795,1390 795,1300 870,1225 870,860 825,815 825,680
  Bottom Layer w40: -4925,1180 -4115,1180 -4065,1130 -4065,910 -4065,800 -3950,685 -3950,185 ; -4925,1205 -4925,1310 ; v1(-4915,970) -4915,1010 -4875,1050 -4260,1050 -4190,980 -4190,765 -4120,695 -4120,595 ; v1(-4695,605) -4695,680 -4730,715 -4885,715 -4990,820 -4990,1080 -4925,1145 -4925,1310 ; -3400,1180 -2590,1180 -2540,1130 -2540,910 -2540,800 -2425,685 ; v1(-3390,970) -3390,1010 -3350,1050 -2735,1050 -2665,980 -2665,765 -2595,695 -2595,595 ; v1(-3170,605) -3170,680 -3205,715 -3430,715 -3465,750 -3465,1080 -3400,1145 -3400,1310 ; -1875,1180 -1065,1180 -1015,1130 -1015,910 -1015,800 -900,685 -900,505 ; -1875,1205 -1875,1310 ; v1(-1865,970) -1865,1010 -1825,1050 -1210,1050 -1140,980 -1140,765 -1070,695 -1070,595 ; v1(-1645,605) -1645,680 -1680,715 -1905,715 -1940,750 -1940,1080 -1875,1145 -1875,1310 ; -350,1180 460,1180 510,1130 510,910 510,800 625,685 v1(625,405) ; -350,1205 -350,1310 ; v1(-340,970) -340,1010 -300,1050 315,1050 385,980 385,765 455,695 455,595 ; v1(-120,605) -120,680 -155,715 -380,715 -415,750 -415,1080 -350,1145 -350,1310 ; -4945,1330 -5040,1330 -4945,1330 ; -4945,1330 -4925,1310 ; -4945,1330 -4925,1310 ; -3420,1330 -3515,1330 -3420,1330 ; -3420,1330 -3400,1310 ; -3420,1330 -3400,1310 ; -1895,1330 -1990,1330 -1895,1330 ; -1895,1330 -1875,1310 ; -1895,1330 -1875,1310 ; -370,1330 -465,1330 -370,1330 ; -370,1330 -350,1310 ; -370,1330 -350,1310
  Bottom Layer w60: v1(-4920,865) -4755,865 -4530,640 ; v1(-4915,1515) -4840,1515 -4790,1465 -4790,1325 -4735,1270 -4090,1270 -4065,1295 -4065,1410 ; -4885,1925 -4885,1781.26 -4886.26,1780 -4695,1780 ; -4565,1410 -4380,1410 -4295,1495 -4295,1780 ; -4095,1780 -4095,1640 -4045,1590 -3780,1590 ; -3830,1925 -3780,1875 -3780,1790 ; v1(-3395,865) -3230,865 -3005,640 ; v1(-3390,1515) -3315,1515 -3265,1465 -3265,1325 -3210,1270 -2565,1270 -2540,1295 -2540,1410 ; -3170,1780 -3361.26,1780 -3360,1781.26 -3360,1925 -3560,1925 -3625,1860 -3625,675 -3550,600 v1(-3445,600) -3445,495 -3390,440 -3005,440 ; -3040,1410 -2855,1410 -2770,1495 -2770,1780 ; -2570,1780 -2570,1640 -2520,1590 -2255,1590 ; -2305,1925 -2255,1875 -2255,1790 ; v1(-1870,865) -1705,865 -1480,640 ; v1(-1865,1515) -1790,1515 -1740,1465 -1740,1325 -1685,1270 -1040,1270 -1015,1295 -1015,1410 ; -1645,1780 -1836.26,1780 -1835,1781.26 -1835,1925 -2035,1925 -2080,1880 -2080,655 -2025,600 v1(-1920,600) -1920,495 -1865,440 -1480,440 ; -1515,1410 -1330,1410 -1245,1495 -1245,1780 ; -1045,1780 -1045,1640 -995,1590 -730,1590 ; -780,1925 -730,1875 -730,1790 ; v1(-345,865) -180,865 45,640 ; v1(-340,1515) -265,1515 -215,1465 -215,1325 -160,1270 485,1270 510,1295 510,1410 ; -120,1780 -311.26,1780 -310,1781.26 -310,1925 -510,1925 -555,1880 -555,655 -500,600 v1(-395,600) -395,495 -340,440 45,440 ; 10,1410 195,1410 280,1495 280,1780 ; 480,1780 480,1640 530,1590 795,1590 ; 745,1925 795,1875 795,1790

## Keep-outs
Keep-Out Layer:
  the board outline again, w10

## Other copper
Top Layer:
  region net IP-_1: 1320,805 1240,805 1240,705 1320,705
  region net IP+_1: 1415,780 1345,780 1345,705 1415,705
  region: -110,780 -180,780 -180,705 -110,705
  region: -205,805 -285,805 -285,705 -205,705
  region: -1635,780 -1705,780 -1705,705 -1635,705
  region: -1730,805 -1810,805 -1810,705 -1730,705
  region: -3160,780 -3230,780 -3230,705 -3160,705
  region: -3255,805 -3335,805 -3335,705 -3255,705
  region: -4685,780 -4755,780 -4755,705 -4685,705
  region: -4780,805 -4860,805 -4860,705 -4780,705
Bottom Layer:
  region net GND: 1925,475 1560,475 1560,400 1925,400
  region: 400,475 35,475 35,400 400,400
  region: -1125,475 -1490,475 -1490,400 -1125,400
  region: -2650,475 -3015,475 -3015,400 -2650,400
  region: -4175,475 -4540,475 -4540,400 -4175,400

## Silkscreen, mask and mechanical layers (free items; w line width, h text height)
Top Overlay:
  lines w10: -3665,350 -3665,1990 ; -3665,350 -2140,350 ; -3665,350 -3665,1990 ; -3665,350 -5190,350 -5190,1990 -3665,1990 ; -3665,1990 -2140,1990 ; -2140,350 -2140,1990 ; -2140,350 -615,350 ; -2140,350 -2140,1990 ; -2140,1990 -615,1990 ; -615,350 -615,1990 ; -615,350 910,350 ; -615,350 -615,1990 ; -615,1990 910,1990 ; 910,350 2435,350 2435,1990 910,1990 ; 910,350 910,1990 ; 910,350 910,1990

## Text inside footprints (layer, text, board x,y; h text height)
U4: Top Overlay "1117" at -2775,-670 h50 r90
U5: Top Overlay "LM2576" at -4750,-295 h50 r90